# Altium PCB FallDetection.PcbDoc (part 2 of 2)
Units mil, origin at the board's own origin, x right, y up, seen from the top; angles counter-clockwise.
Board outline 2362.2 x 2362.2 mil, 2 copper layers (Top Layer, Bottom Layer); 60 components, 54 nets, 304 pads, 59 vias.
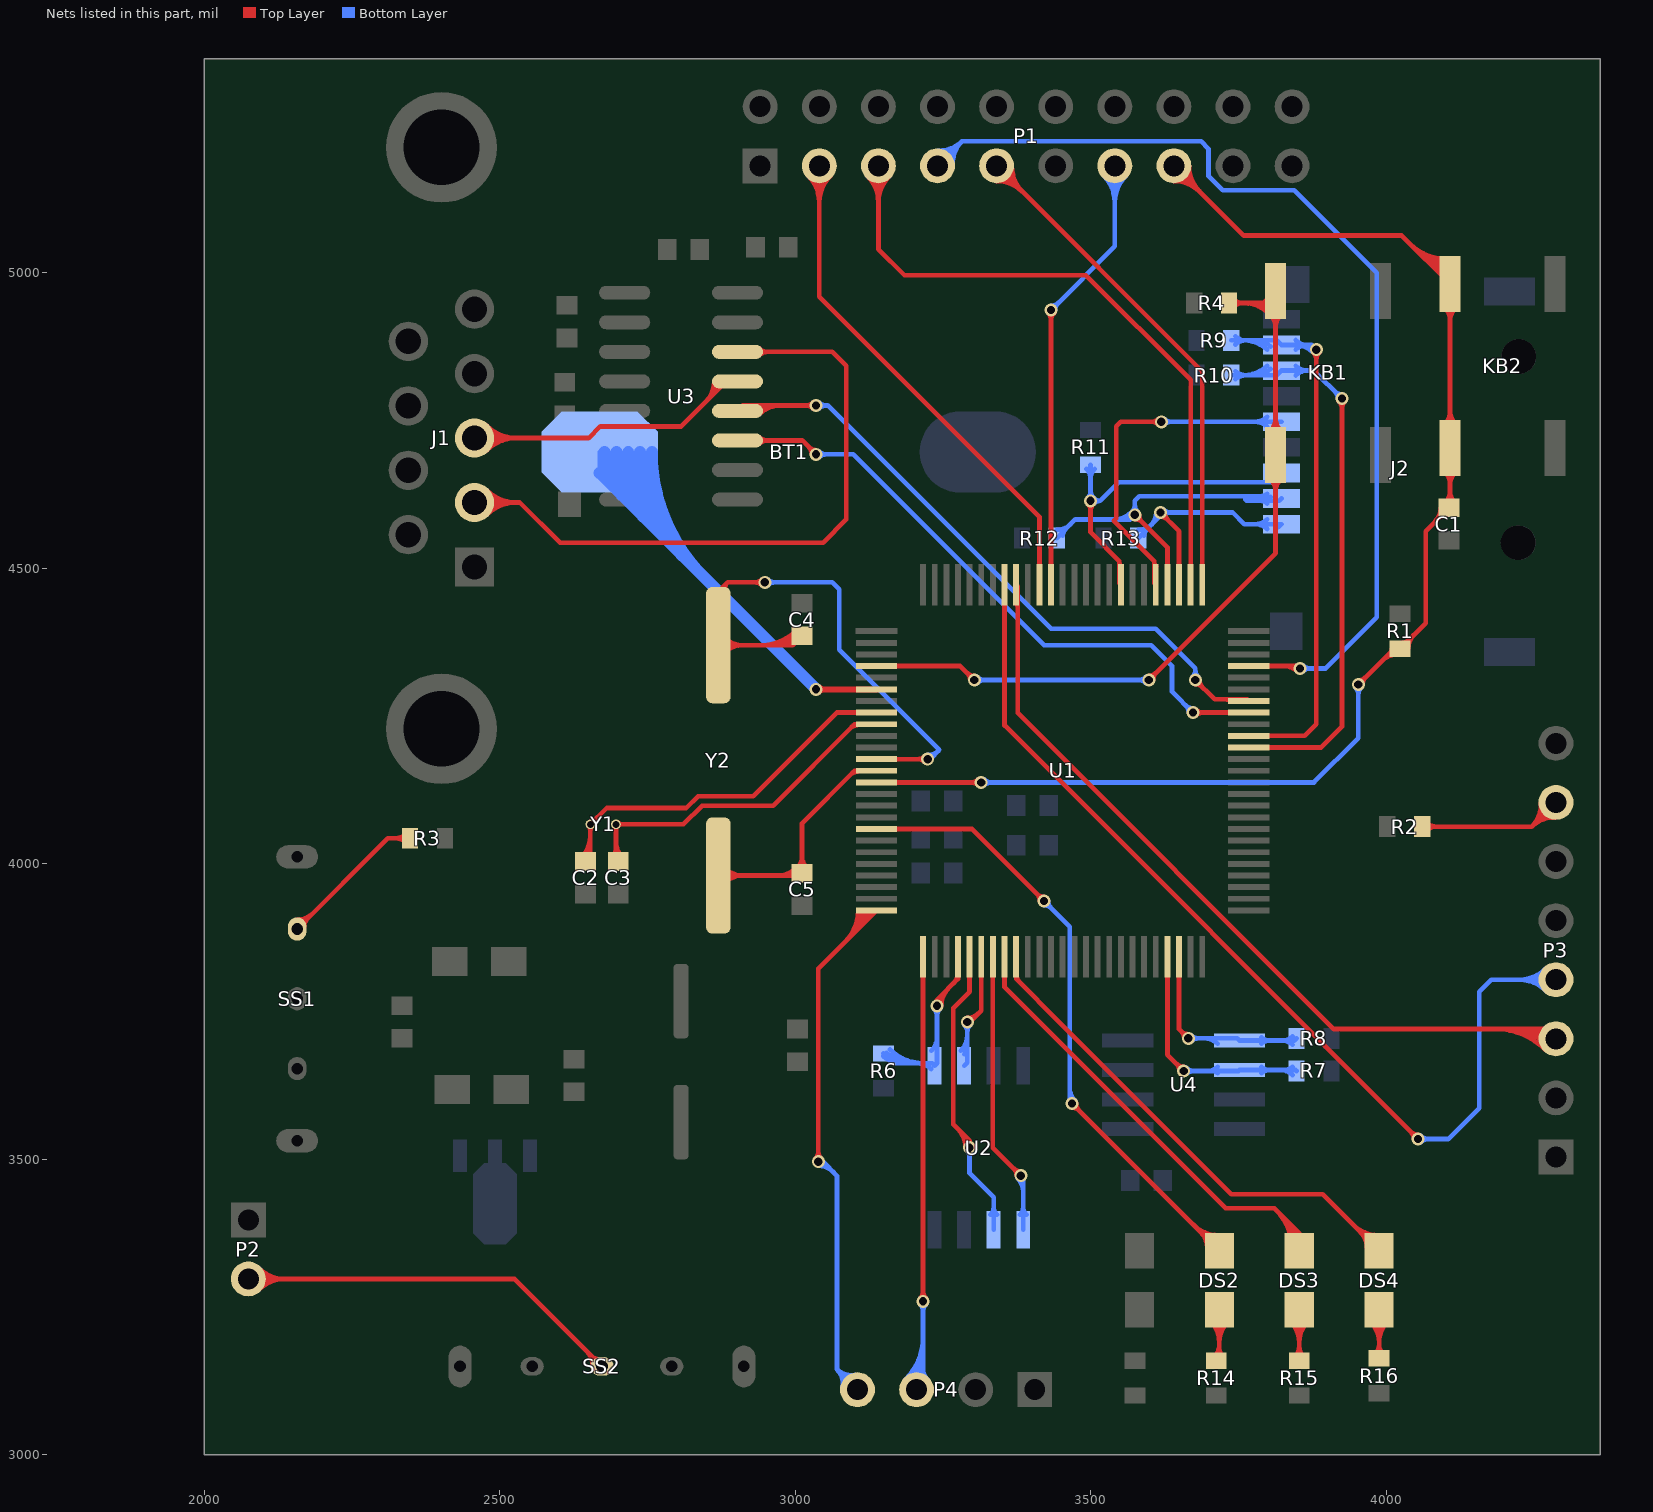
[diagram p2: the nets of this part, all layers, seen from the top]

## Via types
v1: diameter 22, hole 14, Top Layer to Bottom Layer, 55 vias
v2: diameter 216.54, hole 129.92, Top Layer to Bottom Layer, 4 vias

## Nets (pads, with @x,y where several pads share a name; then routed paths per layer and width w, separated by ;. In a path a pad name is that pad's centre, name@x,y a point inside that pad or via, vN(x,y) a via of type N, cw(c..) or ccw(c..) an arc to the next point about the centre after c; other vN are vias at no path point) (continued)
NetDS2_A: DS2.A R14.1 | length 251
  Top Layer w8: DS2.A@3703.28,3225.31 cw(c3668.1,3190.13) 3717.85,3190.13 cw(c3767.6,3190.13) DS2.A@3732.42,3225.31 ; DS2.A@3708.93,3230.97 cw(c3687.41,3209.45) 3717.85,3209.45 cw(c3748.28,3209.45) DS2.A@3726.76,3230.97 ; R14.1@3709.62,3166.36 ccw(c3689.76,3186.23) 3717.85,3186.23 ; R14.1@3712.6,3159.45 3717.85,3164.7 DS2.A@3717.85,3245.28 ; 3717.85,3179.89 ccw(c3736.98,3179.89) R14.1@3723.45,3166.36
NetDS3_A: DS3.A R15.1 | length 248.9
  Top Layer w8: DS3.A@3838.45,3225.31 cw(c3803.27,3190.13) 3853.02,3190.13 cw(c3902.77,3190.13) DS3.A@3867.59,3225.31 ; DS3.A@3844.1,3230.97 cw(c3822.58,3209.45) 3853.02,3209.45 cw(c3883.45,3209.45) DS3.A@3861.93,3230.97 ; R15.1@3846.1,3166.36 ccw(c3829.41,3183.06) 3853.02,3183.06 ccw(c3876.63,3183.06) R15.1@3859.93,3166.36 ; R15.1@3853.02,3159.45 DS3.A@3853.02,3245.28
NetDS4_A: DS4.A R16.1 | length 244.9
  Top Layer w8: DS4.A@3973.62,3225.31 cw(c3938.44,3190.13) 3988.19,3190.13 cw(c4037.94,3190.13) DS4.A@4002.76,3225.31 ; DS4.A@3979.27,3230.97 cw(c3957.75,3209.45) 3988.19,3209.45 cw(c4018.62,3209.45) DS4.A@3997.1,3230.97 ; R16.1@3981.27,3170.3 ccw(c3964.58,3187) 3988.19,3187 ccw(c4011.8,3187) R16.1@3995.1,3170.3 ; R16.1@3988.19,3163.39 DS4.A@3988.19,3245.28
NetJ1_2: J1.2 U3.14 | length 1348.7
  Top Layer w8: J1.2@2457.48,4611.42 2534.25,4611.42 2602.36,4543.31 3047.24,4543.31 3086.61,4582.68 3086.61,4842.52 3062.8,4866.34 U3.14@2902.56,4866.34 ; J1.2@2472.52,4596.38 cw(c2508.83,4560.07) 2508.83,4611.42 cw(c2508.83,4662.76) J1.2@2472.52,4626.46 ; J1.2@2478.18,4590.72 cw(c2528.14,4540.76) 2528.14,4611.42 cw(c2528.14,4682.08) J1.2@2478.18,4632.11 ; U3.14@2939.58,4860.82 cw(c2952.91,4847.48) 2952.91,4866.34 cw(c2952.91,4885.2) U3.14@2939.58,4871.86
NetJ1_3: J1.3 U3.13 | length 737.2
  Top Layer w8: J1.3@2457.48,4720.47 2650.58,4720.47 2670.26,4740.15 2807.08,4740.15 2883.27,4816.34 U3.13@2902.56,4816.34 ; J1.3@2472.52,4705.43 cw(c2508.83,4669.13) 2508.83,4720.47 cw(c2508.83,4771.82) J1.3@2472.52,4735.51 ; J1.3@2478.18,4699.78 cw(c2528.14,4649.81) 2528.14,4720.47 cw(c2528.14,4791.13) J1.3@2478.18,4741.17 ; 2849.1,4782.17 ccw(c2814.93,4816.34) U3.13@2863.25,4816.34 ; 2862.76,4795.83 ccw(c2842.24,4816.34) U3.13@2871.25,4816.34
NetP2_2: P2.2 SS2.2 | length 882.1
  Top Layer w8: P2.2@2074.8,3297.64 2525.2,3297.64 SS2.2@2673.23,3149.61 ; P2.2@2087.2,3285.24 cw(c2117.12,3255.32) 2117.12,3297.64 cw(c2117.12,3339.95) P2.2@2087.2,3310.03 ; P2.2@2092.85,3279.59 cw(c2136.43,3236.01) 2136.43,3297.64 cw(c2136.43,3359.27) P2.2@2092.85,3315.69 ; 2646.45,3176.38 cw(c2619.68,3149.61) SS2.2@2657.54,3149.61 ; 2655.96,3166.88 ccw(c2669.29,3180.21) SS2.2@2669.29,3161.35 ; 2660.11,3162.73 cw(c2646.99,3149.61) SS2.2@2665.54,3149.61
NetP3_7: P3.7 R2.2 | length 428.6
  Top Layer w8: R2.2@4061.02,4062.99 4246.46,4062.99 ; R2.2@4067.94,4056.08 cw(c4084.63,4039.38) 4084.63,4062.99 cw(c4084.63,4086.6) R2.2@4067.94,4069.91 ; P3.7@4261.9,4102.79 cw(c4209.05,4100.4) 4246.46,4062.99 ; P3.7@4269.89,4103.15 cw(c4233.6,4101.51) 4259.29,4075.83 cw(c4284.97,4050.14) P3.7@4286.61,4086.43 ; P3.7@4286.25,4078.44 ccw(c4283.87,4025.59) 4246.46,4062.99 ; P3.7@4287.4,4103.94 4246.46,4062.99
NetR3_1: R3.1 SS1.3 | length 350.8
  Top Layer w8: SS1.3@2157.48,3889.76 2311.02,4043.31 R3.1@2348.43,4043.31 ; SS1.3@2157.48,3897.45 ccw(c2157.48,3916) 2170.6,3902.88 ; SS1.3@2157.48,3905.45 ccw(c2157.48,3943.32) 2184.26,3916.54 ; SS1.3@2169.23,3893.7 cw(c2188.09,3893.7) 2174.75,3907.03 ; R3.1@2341.51,4036.39 ccw(c2324.82,4019.7) 2324.82,4043.31 ccw(c2324.82,4066.92) R3.1@2341.51,4050.22
NRST: C1.2 KB2.2 KB2.3 P1.15 R1.1 U1.14 | length 3084.3
  Top Layer w8: U1.14@3137.79,4137.8 v1(3314.96,4137.8) ; v1@3310.01,4132.85 ccw(c3298.06,4120.9) 3298.06,4137.8 ccw(c3298.06,4154.69) v1@3310.01,4142.75 ; P1.15@3640.94,5155.57 cw(c3640.94,5093.95) 3684.52,5137.52 cw(c3728.1,5181.1) P1.15@3666.47,5181.1 ; P1.15@3640.94,5163.57 cw(c3640.94,5121.26) 3670.87,5151.18 cw(c3700.79,5181.1) P1.15@3658.47,5181.1 ; P1.15@3640.94,5181.1 3759.06,5062.99 4026.57,5062.99 KB2.2@4108.27,4981.3 KB2.3@4108.27,4703.74 4108.27,4604.33 C1.2@4106.3,4602.36 4066.93,4562.99 4066.93,4407.48 R1.1@4023.62,4364.17 4013.78,4364.17 v1(3952.95,4303.34) ; v1@3952.95,4310.34 ccw(c3952.95,4327.24) 3964.9,4315.29 ccw(c3976.85,4303.34) v1@3959.95,4303.34 ; 3992.91,4343.3 cw(c4019.68,4316.53) R1.1@4019.68,4354.39 ; R1.1@4006.57,4356.96 cw(c4019.68,4343.84) R1.1@4019.68,4362.39 ; R1.1@4007.17,4357.56 ccw(c4000.55,4364.17) R1.1@4009.91,4364.17 ; R1.1@4027.56,4373.95 ccw(c4027.56,4388.06) 4037.53,4378.08 ; R1.1@4037.34,4364.17 cw(c4070.45,4364.17) 4047.04,4387.59 ; 4041.34,5048.23 ccw(c4099.49,5106.37) KB2.2@4107.01,5024.49 ; 4053.4,5036.16 ccw(c4101.52,5084.28) KB2.2@4107.74,5016.52 ; 4065.47,5024.1 ccw(c4103.55,5062.18) KB2.2@4108.48,5008.55 ; 4077.53,5012.04 ccw(c4105.58,5040.09) KB2.2@4109.21,5000.59 ; 4082.88,4578.95 ccw(c4059.47,4602.36) C1.2@4092.58,4602.36 ; 4087.64,4583.7 cw(c4104.33,4567) C1.2@4104.33,4590.61 ; 4089.59,4999.98 ccw(c4107.61,5018) KB2.2@4109.94,4992.62 ; KB2.3@4098.57,4664.51 cw(c4075.15,4641.1) 4108.27,4641.1 cw(c4141.38,4641.1) KB2.3@4117.97,4664.51 ; KB2.3@4098.57,4742.97 ccw(c4075.15,4766.38) 4108.27,4766.38 ccw(c4141.38,4766.38) KB2.3@4117.97,4742.97 ; KB2.2@4098.57,4942.07 cw(c4075.15,4918.66) 4108.27,4918.66 cw(c4141.38,4918.66) KB2.2@4117.97,4942.07 ; C1.2@4099.96,4610.67 ccw(c4079.91,4630.72) 4108.27,4630.72 ccw(c4136.63,4630.72) C1.2@4116.57,4610.67 ; KB2.2@4101.65,4987.91 ccw(c4109.64,4995.9) KB2.2@4110.67,4984.65
  Bottom Layer w8: v1(3314.96,4137.8) 3877.95,4137.8 3952.95,4212.79 v1(3952.95,4303.34) ; v1@3319.91,4132.85 cw(c3331.86,4120.9) 3331.86,4137.8 cw(c3331.86,4154.69) v1@3319.91,4142.75 ; v1@3948,4298.39 cw(c3936.05,4286.44) 3952.95,4286.44 cw(c3969.85,4286.44) v1@3957.9,4298.39
OSCI: C4.1 U1.12 Y2.2 | length 1293.3
  Top Layer w8: Y2.2@2876.21,4363.95 cw(c2891.01,4349.15) 2891.01,4370.08 cw(c2891.01,4391.01) Y2.2@2876.21,4376.21 ; Y2.2@2877.28,4452.66 cw(c2888.36,4460.07) 2878.94,4469.49 ; Y2.2@2881.87,4358.29 cw(c2910.32,4329.84) 2910.32,4370.08 cw(c2910.32,4410.32) Y2.2@2881.87,4381.87 ; Y2.2@2883.93,4457.1 cw(c2896.62,4465.59) 2885.83,4476.38 ; 2943.46,4370.08 ccw(c2943.46,4452.21) C4.1@3001.54,4394.13 ; v1@2943.87,4471.43 ccw(c2931.92,4459.48) 2931.92,4476.38 ccw(c2931.92,4493.28) v1@2943.87,4481.33 ; v1(2948.82,4476.38) 2885.83,4476.38 ; 2962.77,4370.08 ccw(c2962.77,4432.89) C4.1@3007.19,4388.48 ; 2982.09,4370.08 ccw(c2982.09,4413.58) C4.1@3012.85,4382.82 ; C4.1@3011.81,4385.83 2996.06,4370.08 Y2.2@2870.08,4370.08 2870.08,4460.63 2885.83,4476.38 ; U1.12@3137.79,4177.17 v1(3224.41,4177.17) ; v1@3219.46,4172.22 ccw(c3207.51,4160.27) 3207.51,4177.17 ccw(c3207.51,4194.07) v1@3219.46,4182.12
  Bottom Layer w8: v1(2948.82,4476.38) 3062.99,4476.38 3074.8,4464.57 3074.8,4362.2 3244.09,4192.91 3228.35,4177.17 v1(3224.41,4177.17) ; v1@2953.77,4471.43 cw(c2965.72,4459.48) 2965.72,4476.38 cw(c2965.72,4493.28) v1@2953.77,4481.33 ; v1@3224.41,4184.17 ccw(c3224.41,4210.57) 3243.08,4191.9
OSCO: C5.1 U1.13 Y2.1 | length 620.7
  Top Layer w8: Y2.1@2870.08,3980.32 3007.87,3980.32 C5.1@3011.81,3984.25 3011.81,4068.78 3100.51,4157.48 U1.13@3137.79,4157.48 ; Y2.1@2876.21,3974.18 cw(c2891.01,3959.39) 2891.01,3980.32 cw(c2891.01,4001.24) Y2.1@2876.21,3986.45 ; Y2.1@2881.87,3968.53 cw(c2910.32,3940.07) 2910.32,3980.32 cw(c2910.32,4020.56) Y2.1@2881.87,3992.1 ; 2971.98,3980.31 ccw(c2971.98,4022.12) C5.1@3001.54,3992.56 ; 2990.98,3980.32 cw(c2990.98,3965.39) C5.1@3001.54,3975.94 ; 2991.29,3980.32 ccw(c2991.29,4002.8) C5.1@3007.19,3986.9 ; C5.1@3003.5,3992.56 ccw(c2983.45,4012.61) 3011.81,4012.61 ccw(c3040.17,4012.61) C5.1@3020.12,3992.56 ; 3093.65,4150.62 cw(c3107.79,4136.48) U1.13@3107.79,4156.48 ; 3096.87,4153.84 cw(c3104.44,4146.27) U1.13@3107.51,4156.52
PA2: P4.4 U1.25 | length 1206.7
  Top Layer w8: v1@3034.42,3501.01 ccw(c3022.47,3512.96) 3039.37,3512.96 ccw(c3056.27,3512.96) v1@3044.32,3501.01 ; v1(3039.37,3496.06) 3039.37,3822.84 U1.25@3137.79,3921.26 ; 3084.87,3868.34 ccw(c3031.95,3921.26) U1.25@3106.79,3921.26 ; 3098.53,3882 ccw(c3059.27,3921.26) U1.25@3114.79,3921.26 ; 3112.19,3895.65 ccw(c3086.58,3921.26) U1.25@3122.79,3921.26 ; 3125.85,3909.31 ccw(c3113.9,3921.26) U1.25@3130.79,3921.26
  Bottom Layer w8: v1@3039.37,3489.06 cw(c3039.37,3453.13) 3064.78,3478.54 ; v1(3039.37,3496.06) 3047.26,3496.06 3070.87,3472.45 3070.87,3144.88 ; v1@3039.37,3497.06 cw(c3039.37,3480.44) 3051.12,3492.19 ; P4.4@3080.38,3114.69 ccw(c3046.65,3120.66) 3070.87,3144.88 ; P4.4@3088.25,3113.29 ccw(c3065.09,3117.39) 3081.72,3134.02 ccw(c3098.35,3150.65) P4.4@3102.46,3127.5 ; P4.4@3101.06,3135.37 cw(c3095.09,3169.1) 3070.87,3144.88 ; P4.4@3105.51,3110.24 3070.87,3144.88
PA3: P4.3 U1.26 | length 1029.6
  Top Layer w8: v1@3211.59,3264.79 ccw(c3199.64,3276.74) 3216.54,3276.74 ccw(c3233.44,3276.74) v1@3221.49,3264.79 ; v1(3216.54,3259.84) 3216.54,3476.37 U1.26@3216.54,3842.52
  Bottom Layer w8: P4.3@3187.46,3128.29 ccw(c3117.27,3198.48) 3216.54,3198.48 ; P4.3@3193.12,3122.63 ccw(c3136.58,3179.17) 3216.54,3179.17 ; P4.3@3198.77,3116.97 ccw(c3155.9,3159.85) 3216.54,3159.85 ; P4.3@3204.43,3111.32 ccw(c3175.21,3140.54) 3216.54,3140.54 ; P4.3@3205.51,3110.24 3216.54,3121.26 v1(3216.54,3259.84) ; v1@3211.59,3254.89 cw(c3199.64,3242.94) 3216.54,3242.94 cw(c3233.44,3242.94) v1@3221.49,3254.89 ; 3216.54,3145.25 ccw(c3240.53,3145.25) P4.3@3223.56,3128.29
PA4: R6.1 U1.29 U2.1 | length 581.8
  Top Layer w8: v1@3239.16,3759.84 cw(c3260.78,3759.84) 3245.49,3775.13 ; v1(3240.16,3759.84) 3240.16,3769.8 3275.59,3805.23 U1.29@3275.59,3842.52 ; v1@3247.16,3759.84 cw(c3288.1,3759.84) 3259.15,3788.79 ; 3268.73,3798.38 ccw(c3254.59,3812.52) U1.29@3274.59,3812.52
  Bottom Layer w8: R6.1@3149.14,3674.74 ccw(c3178.45,3704.04) 3178.45,3662.6 ; R6.1@3149.61,3679.13 3166.14,3662.6 3231.89,3662.6 U2.1@3236.02,3658.46 3240.16,3662.6 v1(3240.16,3759.84) ; R6.1@3154.8,3680.39 ccw(c3197.76,3723.35) 3197.76,3662.6 ; R6.1@3160.46,3686.05 ccw(c3217.07,3742.66) 3217.07,3662.6 ; 3207.19,3662.6 cw(c3207.19,3629.63) U2.1@3230.5,3652.94 ; U2.1@3230.5,3683.67 ccw(c3207.19,3706.99) 3240.16,3706.99 ; v1@3235.21,3754.89 cw(c3223.26,3742.94) 3240.16,3742.94 cw(c3257.06,3742.94) v1@3245.11,3754.89
PA5: U1.30 U2.6 | length 613.7
  Top Layer w8: 3274.97,3551.8 cw(c3242.86,3519.68) v1@3288.28,3519.68 ; 3288.63,3538.14 cw(c3270.18,3519.68) v1@3296.28,3519.68 ; v1(3295.28,3519.68) 3295.28,3531.5 3267.72,3559.06 3267.72,3755.91 3295.28,3783.46 U1.30@3295.28,3842.52
  Bottom Layer w8: v1@3290.33,3514.74 cw(c3278.38,3502.79) 3295.28,3502.79 cw(c3312.18,3502.79) v1@3300.23,3514.74 ; v1(3295.28,3519.68) 3295.28,3476.38 3336.02,3435.63 U2.6@3336.02,3380.91 ; U2.6@3330.5,3406.11 ccw(c3317.17,3419.45) 3336.02,3419.45 ccw(c3354.88,3419.45) U2.6@3341.55,3406.11
PA6: U1.31 U2.2 | length 288.6
  Top Layer w8: v1(3291.34,3732.28) 3295.28,3732.28 3314.77,3751.78 3314.77,3842.33 U1.31@3314.96,3842.52 ; v1@3291.34,3739.28 ccw(c3291.34,3765.69) 3310.01,3747.02
  Bottom Layer w8: U2.2@3280.5,3683.67 ccw(c3254.33,3709.84) 3291.34,3709.84 ; U2.2@3286.02,3658.46 3291.34,3663.78 v1(3291.34,3732.28) ; U2.2@3286.16,3678.02 ccw(c3273.65,3690.52) 3291.34,3690.52 ; v1@3286.39,3727.33 cw(c3274.44,3715.38) 3291.34,3715.38 cw(c3308.24,3715.38) v1@3296.29,3727.33
PA7: U1.32 U2.5 | length 563.4
  Top Layer w8: U1.32@3334.65,3842.52 3334.65,3748.03 3334.65,3519.68 v1(3381.89,3472.44) ; v1@3374.89,3472.44 ccw(c3357.99,3472.44) 3369.94,3484.39 ccw(c3381.89,3496.34) v1@3381.89,3479.44
  Bottom Layer w8: v1@3376.94,3467.49 cw(c3355.01,3445.56) 3386.02,3445.56 ; U2.5@3380.5,3406.11 ccw(c3367.17,3419.45) 3386.02,3419.45 ccw(c3404.88,3419.45) U2.5@3391.55,3406.11 ; v1(3381.89,3472.44) 3386.02,3468.31 U2.5@3386.02,3380.91
PA9: U1.68 U3.11 | length 1217
  Top Layer w8: U3.11@2902.56,4716.34 3012.01,4716.34 v1(3035.43,4692.91) ; U3.11@2939.58,4710.82 cw(c2952.91,4697.48) 2952.91,4716.34 cw(c2952.91,4735.2) U3.11@2939.58,4721.86 ; v1@3028.43,4692.91 ccw(c3011.53,4692.91) 3023.48,4704.86 ccw(c3035.43,4716.81) v1@3035.43,4699.91 ; v1(3673.23,4255.91) U1.68@3767.72,4255.91 ; v1@3678.18,4250.96 cw(c3690.13,4239.01) 3690.13,4255.91 cw(c3690.13,4272.81) v1@3678.18,4260.86
  Bottom Layer w8: v1(3035.43,4692.91) 3098.43,4692.91 3421.26,4370.08 3602.36,4370.08 3637.8,4334.65 3637.8,4291.34 v1(3673.23,4255.91) ; v1@3040.38,4687.96 cw(c3052.33,4676.01) 3052.33,4692.91 cw(c3052.33,4709.81) v1@3040.38,4697.86 ; v1@3666.23,4255.91 ccw(c3649.33,4255.91) 3661.28,4267.86 ccw(c3673.23,4279.81) v1@3673.23,4262.91
PA10: U1.69 U3.12 | length 1267
  Top Layer w8: U3.12@2902.56,4766.34 2911.81,4775.59 v1(3035.43,4775.59) ; U3.12@2933.92,4766.47 cw(c2955.94,4744.46) 2955.94,4775.59 ; U3.12@2939.58,4760.82 cw(c2975.25,4725.14) 2975.25,4775.59 ; v1@3030.48,4770.64 ccw(c3018.53,4758.69) 3018.53,4775.59 ccw(c3018.53,4792.49) v1@3030.48,4780.54 ; v1@3677.17,4304.02 cw(c3677.17,4287.12) 3689.12,4299.07 cw(c3701.06,4311.02) v1@3684.17,4311.02 ; v1(3677.17,4311.02) 3709.91,4278.28 3765.03,4278.28 U1.69@3767.72,4275.59 ; 3728.82,4278.28 cw(c3728.82,4266.69) U1.69@3737.01,4274.88
  Bottom Layer w8: v1(3035.43,4775.59) 3055.12,4775.59 3433.07,4397.64 3610.24,4397.64 3677.17,4330.71 v1(3677.17,4311.02) ; v1@3040.38,4770.64 cw(c3052.33,4758.69) 3052.33,4775.59 cw(c3052.33,4792.49) v1@3040.38,4780.54 ; v1@3672.22,4315.97 ccw(c3660.27,4327.92) 3677.17,4327.92 ccw(c3694.06,4327.92) v1@3682.12,4315.97
PA13: P1.7 U1.72 | length 1912.8
  Top Layer w8: U1.72@3767.72,4334.65 v1@3850.39,4334.65 ; 3827.93,4334.65 cw(c3827.93,4304.31) v1@3849.38,4325.76
  Bottom Layer w8: P1.7@3240.94,5181.1 3282.47,5222.63 ; P1.7@3241.55,5198.62 ccw(c3242.86,5236.21) 3269.46,5209.61 ccw(c3296.06,5183.02) P1.7@3258.46,5181.71 ; P1.7@3241.83,5206.61 ccw(c3243.73,5261.37) 3282.47,5222.63 ; P1.7@3266.46,5181.99 cw(c3321.21,5183.89) 3282.47,5222.63 ; v1(3854.33,4330.71) 3897.64,4330.71 3984.25,4417.32 3984.25,5000 3844.68,5139.57 3723.74,5139.57 3699.42,5163.9 3699.42,5210.03 3686.82,5222.63 3282.47,5222.63 ; v1@3859.28,4325.76 cw(c3871.23,4313.81) 3871.23,4330.71 cw(c3871.23,4347.61) v1@3859.28,4335.66
PA14: P1.9 U1.76 | length 1016.1
  Top Layer w8: P1.9@3340.94,5155.57 cw(c3340.94,5093.95) 3384.52,5137.52 cw(c3428.1,5181.1) P1.9@3366.47,5181.1 ; P1.9@3340.94,5163.57 cw(c3340.94,5121.26) 3370.87,5151.18 cw(c3400.79,5181.1) P1.9@3358.47,5181.1 ; P1.9@3340.94,5181.1 3688.98,4833.07 U1.76@3688.98,4472.44
PA15: P1.5 U1.77 | length 1270.6
  Top Layer w8: P1.5@3122.89,5163.05 cw(c3079.32,5119.47) 3140.94,5119.47 cw(c3202.57,5119.47) P1.5@3159,5163.05 ; P1.5@3128.55,5168.71 cw(c3098.63,5138.79) 3140.94,5138.79 cw(c3183.26,5138.79) P1.5@3153.34,5168.71 ; P1.5@3140.94,5181.1 3140.94,5040.23 3185.11,4996.06 3492.13,4996.06 3669.29,4818.9 U1.77@3669.29,4472.44
PB3: P1.13 U1.89 | length 969.7
  Top Layer w8: v1@3428.12,4932.06 cw(c3416.17,4920.11) 3433.07,4920.11 cw(c3449.97,4920.11) v1@3438.02,4932.06 ; U1.89@3433.07,4472.44 v1(3433.07,4937.01)
  Bottom Layer w8: v1(3433.07,4937.01) 3540.94,5044.88 P1.13@3540.94,5181.1 ; v1@3433.07,4944.01 ccw(c3433.07,4960.91) 3445.02,4948.96 ccw(c3456.97,4937.01) v1@3440.07,4937.01 ; P1.13@3522.89,5163.05 cw(c3479.32,5119.47) 3540.94,5119.47 cw(c3602.57,5119.47) P1.13@3559,5163.05 ; P1.13@3528.55,5168.71 cw(c3498.63,5138.79) 3540.94,5138.79 cw(c3583.26,5138.79) P1.13@3553.34,5168.71
PB4: P1.3 U1.90 | length 1026.2
  Top Layer w8: P1.3@3022.89,5163.05 cw(c2979.32,5119.47) 3040.94,5119.47 cw(c3102.57,5119.47) P1.3@3059,5163.05 ; P1.3@3028.55,5168.71 cw(c2998.63,5138.79) 3040.94,5138.79 cw(c3083.26,5138.79) P1.3@3053.34,5168.71 ; P1.3@3040.94,5181.1 3040.94,4959.8 3413.39,4587.36 U1.90@3413.39,4472.44
PB6: P3.3 U1.92 | length 1646.4
  Top Layer w8: U1.92@3373.31,4441.73 cw(c3365.12,4433.54) 3376.7,4433.54 ; U1.92@3374.02,4472.44 3376.7,4469.76 3376.7,4255.31 3911.53,3720.47 4270.87,3720.47 P3.3@4287.4,3703.94 ; 4185.85,3720.47 cw(c4185.85,3602.39) P3.3@4269.35,3685.89 ; 4205.17,3720.47 cw(c4205.17,3621.7) P3.3@4275.01,3691.54 ; 4224.48,3720.47 cw(c4224.48,3641.02) P3.3@4280.66,3697.2 ; 4243.79,3720.47 cw(c4243.79,3660.33) P3.3@4286.32,3702.86
PB7: P3.4 U1.93 | length 1904.5
  Top Layer w8: U1.93@3354.33,4472.44 3354.33,4234.13 v1(4054.08,3534.39) ; v1@4047.08,3534.39 ccw(c4030.18,3534.39) 4042.13,3546.34 ccw(c4054.08,3558.29) v1@4054.08,3541.39
  Bottom Layer w8: v1(4054.08,3534.39) 4105.26,3534.39 4157.48,3586.61 4157.48,3783.46 4177.95,3803.94 P3.4@4287.4,3803.94 ; v1@4059.03,3529.44 cw(c4070.97,3517.49) 4070.97,3534.39 cw(c4070.97,3551.29) v1@4059.03,3539.34 ; P3.4@4269.35,3785.89 ccw(c4225.77,3742.31) 4225.77,3803.94 ccw(c4225.77,3865.57) P3.4@4269.35,3821.99 ; P3.4@4275.01,3791.54 ccw(c4245.09,3761.62) 4245.09,3803.94 ccw(c4245.09,3846.25) P3.4@4275.01,3816.33
PB10: R7.1 U1.47 U4.6 | length 540.3
  Top Layer w8: U1.47@3629.92,3842.52 3629.92,3677.17 v1@3653.54,3653.54 ; v1@3650.48,3649.61 ccw(c3633.58,3649.61) 3645.53,3661.56 ccw(c3657.48,3673.51) v1@3657.48,3656.61
  Bottom Layer w8: v1(3657.48,3649.61) 3750.59,3649.61 U4.6@3751.98,3651 3847.03,3651 R7.1@3848.43,3649.61 ; v1@3662.43,3644.66 cw(c3674.38,3632.71) 3674.38,3649.61 cw(c3674.38,3666.51) v1@3662.43,3654.56 ; 3698.27,3649.61 ccw(c3698.27,3673.22) U4.6@3714.96,3656.52 ; 3704.99,3649.61 cw(c3704.99,3635.5) U4.6@3714.96,3645.48 ; U4.6@3789,3645.48 cw(c3802.34,3632.14) 3802.34,3651 cw(c3802.34,3669.86) U4.6@3789,3656.52 ; 3821.45,3651 cw(c3821.45,3622.63) R7.1@3841.51,3642.69 ; 3828.18,3651 ccw(c3828.18,3669.85) R7.1@3841.51,3656.52
PB11: R8.1 U1.48 U4.5 | length 475.1
  Top Layer w8: U1.48@3649.61,3842.52 3649.61,3720.47 v1(3665.35,3704.72) ; v1@3658.35,3704.72 ccw(c3641.45,3704.72) 3653.4,3716.67 ccw(c3665.35,3728.62) v1@3665.35,3711.72
  Bottom Layer w8: v1(3665.35,3704.72) 3748.26,3704.72 U4.5@3751.98,3701 3844.7,3701 R8.1@3848.43,3704.72 ; v1@3670.3,3699.77 cw(c3682.25,3687.82) 3682.25,3704.72 cw(c3682.25,3721.62) v1@3670.3,3709.67 ; 3692.64,3704.72 cw(c3692.64,3673.15) U4.5@3714.96,3695.48 ; U4.5@3789,3695.48 cw(c3802.34,3682.14) 3802.34,3701 cw(c3802.34,3719.86) U4.5@3789,3706.52 ; 3824.3,3701 cw(c3824.3,3676.67) R8.1@3841.51,3693.87 ; 3825.33,3701 ccw(c3825.33,3723.89) R8.1@3841.51,3707.7
PC3: DS2.K U1.18 | length 1264.3
  Top Layer w8: U1.18@3137.79,4059.06 3299.21,4059.06 v1(3420.99,3937.27) ; v1@3413.99,3937.27 ccw(c3397.09,3937.27) 3409.04,3949.22 ccw(c3420.99,3961.17) v1@3420.99,3944.27 ; v1@3468.5,3587.49 cw(c3468.5,3570.27) 3480.68,3582.45 ; v1@3468.64,3594.49 DS2.K@3717.85,3345.28 ; v1@3475.5,3594.49 ccw(c3492.09,3594.49) 3480.36,3582.76 ; 3673.46,3389.66 ccw(c3717.85,3434.05) DS2.K@3717.85,3371.28 ; 3686.48,3376.64 cw(c3660.51,3350.67) DS2.K@3697.24,3350.67 ; 3687.12,3376 ccw(c3717.85,3406.73) DS2.K@3717.85,3363.28
  Bottom Layer w8: v1@3420.99,3930.27 cw(c3420.99,3913.37) 3432.94,3925.32 cw(c3444.89,3937.27) v1@3427.99,3937.27 ; v1(3420.99,3937.27) 3464.57,3893.7 3464.57,3598.43 v1(3468.5,3594.49) ; 3464.57,3620.89 ccw(c3494.91,3620.89) v1@3473.45,3599.44
PC4: DS3.K U1.33 | length 931.1
  Top Layer w8: U1.33@3354.33,3842.52 3354.33,3791.34 3728.35,3417.32 3811.02,3417.32 3853.02,3375.33 ; 3814.06,3414.28 cw(c3750.45,3350.67) DS3.K@3840.41,3350.67 ; 3827.72,3400.63 cw(c3777.76,3350.67) DS3.K@3848.41,3350.67 ; 3841.38,3386.97 cw(c3805.07,3350.67) DS3.K@3856.41,3350.67 ; DS3.K@3849.36,3370.95 ccw(c3848.57,3375.33) 3853.02,3375.33 ; DS3.K@3853.02,3345.28 3853.02,3375.33 ; DS3.K@3856.68,3370.95 cw(c3857.47,3375.33) 3853.02,3375.33
PC5: DS4.K U1.34 | length 970
  Top Layer w8: U1.34@3374.02,3842.52 3374.02,3805.23 3447.89,3731.36 3738.3,3440.94 3892.52,3440.94 DS4.K@3988.19,3345.28 ; U1.34@3375.02,3812.52 ccw(c3395.02,3812.52) 3380.88,3798.37 ; 3943.8,3389.66 ccw(c3988.19,3434.05) DS4.K@3988.19,3371.28 ; 3956.83,3376.64 cw(c3930.86,3350.67) DS4.K@3967.58,3350.67 ; 3957.46,3376 ccw(c3988.19,3406.73) DS4.K@3988.19,3363.28
PC8: J2.7 R10.1 U1.65 | length 1143.5
  Top Layer w8: U1.65@3767.72,4196.85 3889.76,4196.85 3925.2,4232.28 v1(3925.2,4787.4) ; v1@3920.25,4782.45 cw(c3908.3,4770.5) 3925.2,4770.5 cw(c3942.1,4770.5) v1@3930.15,4782.45
  Bottom Layer w8: R10.1@3738.19,4826.77 3814.96,4826.77 J2.7@3822.83,4834.65 3877.95,4834.65 v1(3925.2,4787.4) ; R10.1@3745.1,4819.86 cw(c3761.8,4803.16) 3761.8,4826.77 cw(c3761.8,4850.38) R10.1@3745.1,4833.69 ; 3759.72,4826.77 ccw(c3759.72,4882.02) J2.7@3798.78,4842.95 ; 3779.03,4826.77 ccw(c3779.03,4862.7) J2.7@3804.44,4837.3 ; J2.7@3846.89,4826.34 cw(c3866.95,4806.28) 3866.95,4834.65 cw(c3866.95,4863.01) J2.7@3846.89,4842.95 ; v1@3918.2,4787.4 ccw(c3901.3,4787.4) 3913.25,4799.35 ccw(c3925.2,4811.3) v1@3925.2,4794.4
PC9: J2.8 R9.1 U1.66 | length 1139.8
  Top Layer w8: U1.66@3767.72,4216.54 3862.2,4216.54 3881.89,4236.22 v1(3881.89,4870.08) ; v1@3876.94,4865.13 cw(c3864.99,4853.18) 3881.89,4853.18 cw(c3898.79,4853.18) v1@3886.84,4865.13
  Bottom Layer w8: R9.1@3738.19,4885.83 3814.96,4885.83 J2.8@3822.83,4877.95 3874.02,4877.95 v1(3881.89,4870.08) ; R9.1@3745.1,4878.91 cw(c3761.8,4862.22) 3761.8,4885.83 cw(c3761.8,4909.44) R9.1@3745.1,4892.74 ; 3759.72,4885.83 cw(c3759.72,4830.58) J2.8@3798.78,4869.65 ; 3779.03,4885.83 cw(c3779.03,4849.89) J2.8@3804.44,4875.3 ; J2.8@3845.98,4877.95 cw(c3845.98,4834.17) v1@3876.94,4865.13 ; J2.8@3846.89,4869.65 cw(c3866.95,4849.59) 3866.95,4877.95 cw(c3866.95,4906.31) J2.8@3846.89,4886.26 ; 3865.29,4877.95 cw(c3865.29,4853.48) v1@3882.6,4870.79
PC10: J2.1 R13.1 U1.78 | length 569.7
  Top Layer w8: v1@3618.11,4587.49 cw(c3618.11,4570.59) 3630.06,4582.54 cw(c3642.01,4594.49) v1@3625.11,4594.49 ; v1(3618.11,4594.49) 3649.61,4562.99 U1.78@3649.61,4476.38
  Bottom Layer w8: R13.1@3580.71,4551.18 3618.11,4588.58 v1(3618.11,4594.49) 3740.16,4594.49 3759.84,4574.8 J2.1@3822.83,4574.8 J2.1@3817.44,4569.41 ; R13.1@3580.71,4564.9 ccw(c3580.71,4598.01) 3604.12,4574.6 ; R13.1@3590.49,4555.12 cw(c3604.59,4555.12) 3594.62,4565.09 ; 3601.98,4572.46 ccw(c3579.95,4594.49) v1@3611.11,4594.49 ; v1@3623.06,4589.54 cw(c3635.01,4577.59) 3635.01,4594.49 cw(c3635.01,4611.39) v1@3623.06,4599.44 ; J2.1@3798.78,4566.5 ccw(c3778.72,4546.44) 3778.72,4574.8 ccw(c3778.72,4603.17) J2.1@3798.78,4583.11
PC11: J2.2 R12.1 U1.79 | length 883.7
  Top Layer w8: v1@3574.8,4583.55 cw(c3574.8,4566.65) 3586.75,4578.6 cw(c3598.7,4590.55) v1@3581.8,4590.55 ; v1(3574.8,4590.55) 3629.92,4535.43 U1.79@3629.92,4472.44 U1.79@3629.92,4488.19
  Bottom Layer w8: R12.1@3442.91,4551.18 3474.41,4582.68 3566.93,4582.68 v1(3574.8,4590.55) 3574.8,4614.17 3582.68,4622.05 J2.2@3794.58,4622.05 ; R12.1@3442.91,4564.9 ccw(c3442.91,4598.01) 3466.33,4574.6 ; R12.1@3452.69,4555.12 cw(c3466.8,4555.12) 3456.82,4565.09 ; 3538.89,4582.68 ccw(c3538.89,4626.46) 3569.85,4595.5 ccw(c3557.9,4607.45) 3574.8,4607.45 ccw(c3591.7,4607.45) v1@3579.75,4595.5 ; 3558.21,4582.68 ccw(c3558.21,4607.15) v1@3575.51,4589.84 ; 3761.46,4616.49 3763.78,4614.17 3818.9,4614.17 J2.2@3822.83,4618.11 ; 3769.22,4614.17 ccw(c3769.22,4655.98) 3798.78,4626.42 cw(c3788.23,4636.97) 3788.23,4622.05 ; 3769.22,4622.05 cw(c3769.22,4580.24) 3798.78,4609.8 ccw(c3788.23,4599.25) 3788.23,4614.17 ; 3788.53,4614.17 ccw(c3788.53,4636.66) J2.2@3804.44,4620.76 ; 3788.53,4622.05 cw(c3788.53,4599.56) J2.2@3804.44,4615.46
PC12: J2.5 U1.80 | length 688.2
  Top Layer w8: 3607.55,4511.34 ccw(c3619.13,4511.34) U1.80@3610.94,4503.15 ; U1.80@3610.24,4472.44 3607.55,4475.13 3607.55,4512.41 3539.37,4580.59 3543.31,4584.53 3543.31,4740.16 3551.18,4748.03 v1(3619.73,4748.03) ; v1@3614.78,4743.08 ccw(c3602.83,4731.13) 3602.83,4748.03 ccw(c3602.83,4764.93) v1@3614.78,4752.98
  Bottom Layer w8: v1(3619.73,4748.03) J2.5@3822.83,4748.03 ; v1@3624.68,4743.08 cw(c3636.63,4731.13) 3636.63,4748.03 cw(c3636.63,4764.93) v1@3624.68,4752.98 ; J2.5@3798.78,4739.72 ccw(c3778.72,4719.67) 3778.72,4748.03 ccw(c3778.72,4776.39) J2.5@3798.78,4756.34
PC14: C2.1 U1.8 Y1.2 | length 722.2
  Top Layer w8: C2.1@2639.33,4012.24 ccw(c2605.02,4046.56) 2653.54,4046.56 ; C2.1@2644.99,4006.59 ccw(c2624.33,4027.24) 2653.54,4027.24 ; C2.1@2645.67,4003.94 2653.54,4011.81 Y1.2@2653.54,4066.93 2681.1,4094.49 2815.96,4094.49 2835.89,4114.43 2929.39,4114.43 3070.87,4255.91 U1.8@3137.79,4255.91 ; Y1.2@2650.53,4063.91 cw(c2643.24,4056.63) 2653.54,4056.63 cw(c2663.85,4056.63) Y1.2@2656.56,4063.91 ; Y1.2@2653.54,4071.2 ccw(c2653.54,4081.5) 2660.83,4074.21 ccw(c2668.11,4066.93) Y1.2@2657.81,4066.93
PC15: C3.1 U1.9 Y1.1 | length 679.8
  Top Layer w8: C3.1@2690.51,4012.24 ccw(c2675.21,4027.55) 2696.85,4027.55 ; Y1.1@2693.83,4063.91 cw(c2686.55,4056.63) 2696.85,4056.63 cw(c2707.15,4056.63) 2699.87,4063.91 cw(c2707.15,4056.63) 2707.15,4066.93 cw(c2707.15,4077.23) Y1.1@2699.87,4069.95 ; 2696.85,4037.05 ccw(c2731.93,4037.05) C3.1@2707.13,4012.24 ; C3.1@2700.79,4003.94 2696.85,4007.87 Y1.1@2696.85,4066.93 2811.02,4066.93 2842.52,4098.43 2962.71,4098.43 3100.51,4236.22 U1.9@3137.79,4236.22 ; 3093.65,4229.36 cw(c3107.79,4215.22) U1.9@3107.79,4235.22 ; 3096.87,4232.58 cw(c3104.44,4225.01) U1.9@3107.51,4235.26
PD2: J2.3 R11.1 U1.83 | length 707
  Top Layer w8: v1@3495.05,4609.22 cw(c3483.1,4597.27) 3500,4597.27 cw(c3516.9,4597.27) v1@3504.95,4609.22 ; v1(3500,4614.17) 3500,4560.91 3548.5,4512.41 3548.5,4475.13 U1.83@3551.18,4472.44 ; 3548.5,4511.34 ccw(c3560.08,4511.34) U1.83@3551.89,4503.15
  Bottom Layer w8: R11.1@3493.08,4668.28 cw(c3476.39,4651.59) 3500,4651.59 cw(c3523.61,4651.59) R11.1@3506.92,4668.28 ; v1@3495.05,4619.12 ccw(c3483.1,4631.07) 3500,4631.07 ccw(c3516.9,4631.07) v1@3504.95,4619.12 ; R11.1@3500,4675.2 v1(3500,4614.17) 3516.13,4614.17 ; v1@3505.11,4609.39 cw(c3516.13,4599.09) 3516.13,4614.17 ; v1@3505.11,4618.95 ccw(c3516.13,4629.26) 3516.13,4614.17 ; J2.3@3811.02,4673.23 J2.3@3822.83,4661.42 3807.28,4645.86 3786.18,4645.86 3785.99,4645.67 3547.63,4645.67 3516.13,4614.17
PE5: KB1.2 KB1.3 R4.1 U1.4 | length 1688.7
  Top Layer w8: U1.4@3137.79,4334.65 3279.53,4334.65 v1(3303.15,4311.02) ; v1@3296.15,4311.02 ccw(c3279.25,4311.02) 3291.2,4322.97 ccw(c3303.15,4334.92) v1@3303.15,4318.02 ; v1(3598.43,4311.02) 3812.99,4525.59 KB1.3@3812.99,4691.93 KB1.2@3812.99,4969.49 3792.32,4948.82 R4.1@3734.25,4948.82 ; v1@3598.43,4318.02 ccw(c3598.43,4334.92) 3610.37,4322.97 ccw(c3622.32,4311.02) v1@3605.43,4311.02 ; R4.1@3741.17,4941.9 cw(c3757.86,4925.21) 3757.86,4948.82 cw(c3757.86,4972.43) R4.1@3741.17,4955.73 ; 3758.49,4948.82 cw(c3758.49,4885.46) 3803.29,4930.26 cw(c3779.88,4906.85) 3812.99,4906.85 cw(c3846.11,4906.85) KB1.2@3822.69,4930.26 ; 3777.81,4948.82 cw(c3777.81,4904.77) KB1.2@3808.95,4935.92 ; KB1.3@3803.29,4652.7 cw(c3779.88,4629.29) 3812.99,4629.29 cw(c3846.11,4629.29) KB1.3@3822.69,4652.7 ; KB1.3@3803.29,4731.16 ccw(c3779.88,4754.57) 3812.99,4754.57 ccw(c3846.11,4754.57) KB1.3@3822.69,4731.16
  Bottom Layer w8: v1(3303.15,4311.02) v1(3598.43,4311.02) ; v1@3308.1,4306.07 cw(c3320.05,4294.12) 3320.05,4311.02 cw(c3320.05,4327.92) v1@3308.1,4315.97 ; v1@3593.48,4306.07 ccw(c3581.53,4294.12) 3581.53,4311.02 ccw(c3581.53,4327.92) v1@3593.48,4315.97
VBAT: BT1.1 U1.6 | length 1473.4
  Top Layer w10: v1(3035.43,4295.28) U1.6@3137.79,4295.28 ; v1@3039.68,4291.03 cw(c3049.92,4280.79) 3049.92,4295.28 cw(c3049.92,4309.76) v1@3039.68,4299.52
  Bottom Layer w8: BT1.1@2669.29,4661.42 BT1.1@2669.29,4696.85
  Bottom Layer w20: BT1.1@2669.29,4661.42 v1(3035.43,4295.28) ; BT1.1@2677.72,4696.85 ccw(c2783.6,4696.85) 2708.73,4621.98 ; BT1.1@2697.72,4696.85 ccw(c2851.88,4696.85) 2742.87,4587.84 ; BT1.1@2717.72,4696.85 ccw(c2920.17,4696.85) 2777.01,4553.7 ; BT1.1@2737.72,4696.85 ccw(c2988.45,4696.85) 2811.16,4519.55 ; BT1.1@2757.72,4696.85 ccw(c3056.74,4696.85) 2845.3,4485.41
pads on no net: J1.1 J1.4 J1.6 J1.7 J1.8 J1.9 J1.10 J1.11 J2.0 J2.9 J2.10 J2.11 J2.12 J2.13 P1.11 P1.17 P1.19 P3.5 P3.6 P3.8 SS1.4 SS1.5 SS2.1 SS2.4 SS2.5 U1.1 U1.2 U1.3 U1.5 U1.7 U1.15 U1.16 U1.17 U1.23 U1.24 U1.35 U1.36 U1.38 U1.39 U1.40 U1.41 U1.42 U1.43 U1.44 U1.45 U1.46 U1.51 U1.52 U1.53 U1.54 U1.55 U1.56 U1.57 U1.58 U1.59 U1.60 U1.61 U1.62 U1.63 U1.64 U1.67 U1.70 U1.71 U1.73 U1.81 U1.82 U1.84 U1.85 U1.86 U1.87 U1.88 U1.91 U1.95 U1.96 U1.97 U1.98 U3.7 U3.8 U3.9 U3.10
copper on no net:
  other v2: 2118.11,3114.17 4224.41,3133.86 4204.72,5220.47 2704.72,5236.22

## Polygon pours and split planes (outlines as drawn)
GND on Top Layer "Bottom Layer-No Net" (solid): 2035.43,5350.39 4338.58,5350.39 4338.58,3011.81 2011.81,3011.81 2011.81,5350.39
3V3 on Bottom Layer "Bottom Layer-No Net" (solid): 2011.81,5330.71 2031.5,5350.39 4350.39,5350.39 4350.39,3011.81 2011.81,3011.81 2011.81,5350.39

## Keep-outs
Keep-Out Layer:
  lines w11.81: 2011.81,3011.81 2011.81,5350.39 4350.39,5350.39 4350.39,3011.81 2011.81,3011.81

## Silkscreen, mask and mechanical layers (free items; w line width, h text height)
Top Overlay:
  text "GND" at 3905.51,5299.21 h40
  text "3.3v" at 2909.45,5098.43 h40
  text "BOOT0" at 2129.92,3712.6 h40 r90
  text "GND" at 4157.48,3586.61 h40
  text "3.3v" at 4165.35,3492.13 h40
  text "3.3v" at 3381.89,3169.29 h40
  text "GND" at 3267.72,3165.35 h40
  text "3.7v" at 2531.5,3086.61 h40
  text "3.3v" at 4515.75,1433.07 h80
Mechanical 15:
  lines w10: 1865.83,3060 1885.83,3000 ; 1865.83,5302.2 1885.83,5362.2 ; 1875.83,3000 1895.83,3000 ; 1875.83,5362.2 1895.83,5362.2 ; 1885.83,3785.23 1885.83,3000 ; 1885.83,4576.98 1885.83,5362.2 ; 1905.83,3060 1885.83,3000 ; 1905.83,5302.2 1885.83,5362.2 ; 1988.19,5533.31 1988.19,5553.31 ; 2048.19,5523.31 1988.19,5543.31 ; 2048.19,5563.31 1988.19,5543.31 ; 2773.41,5543.31 1988.19,5543.31 ; 3565.17,5543.31 4350.39,5543.31 ; 4290.39,5523.31 4350.39,5543.31 ; 4290.39,5563.31 4350.39,5543.31 ; 4350.39,5533.31 4350.39,5553.31
  text "2362.205 (mil)" at 2783.41,5507.32 h50
  text "2362.205 (mil)" at 1921.82,3795.23 h50 r90

## Text inside footprints (layer, text, board x,y; h text height)
J1: Top Overlay "1" at 2593.5,4492.52 h50 r90; Top Overlay "5" at 2574.8,4921.26 h50 r90; Top Overlay "9" at 2223.43,4864.37 h50 r90; Top Overlay "6" at 2223.43,4537.2 h50 r90
P1: Top Overlay "2" at 2840.94,5261.1 h50; Top Overlay "1" at 2840.94,5161.1 h50; Top Overlay "19" at 3900.94,5161.1 h50; Top Overlay "20" at 3900.94,5261.1 h50